# EAGLE board vga (EAGLE 7.2.0)
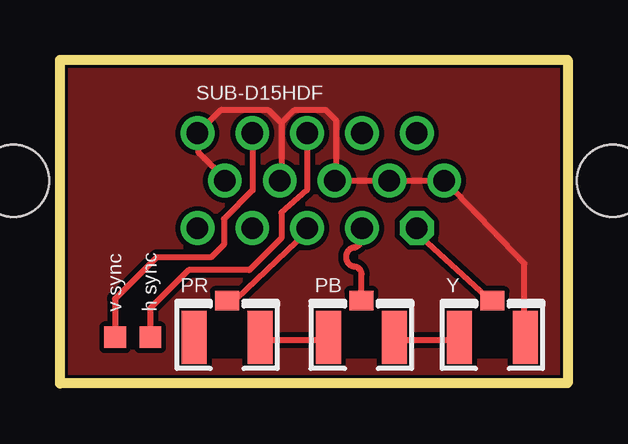
[diagram p0: board, top side]
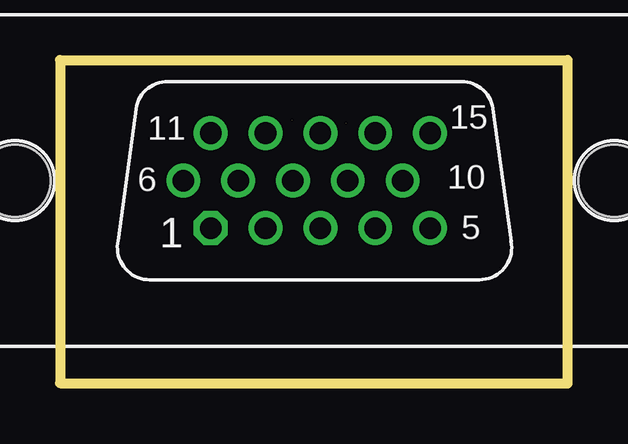
[diagram p1: board, bottom side, seen from below]

Size 21.17 x 13.5 mm. Coordinates in mm from the lower left corner, seen from the top.
Outline: 21.17,13.5 0,13.5 0,0 21.17,0.02 21.17,13.5
Copper layers (1*16): Top 0.035mm / dielectric 1.5mm / Bottom 0.035mm
Design rules "default *": minimum track width 10mil, minimum drill 24mil, track to track 8mil, track to pad 8mil, pad to pad 8mil, via to via 8mil, smd to smd 8mil, copper to edge 5mil, drill to drill 8mil, minimum pad ring 10mil, minimum via ring 8mil, stop-mask expansion 4mil, vias tented up to drill 0mil, thermal gap 10mil

## Footprints (pad centres in the part's own frame; a part is rotated, then mirrored left to right if it is on the bottom)
TP09SQ = smd 0.9 x 0.9: TP 0,0
U.FL = smd 2.2 x 1.05: 1 0,1.375; 2 0,-1.375 | smd 0.8 x 1: 3 1.525,0
HDF15V = drill 0.9 octagon: 1 4.579,1.98 | drill 0.9: 2 2.293,1.98; 3 0.007,1.98; 4 -2.279,1.98; 5 -4.565,1.98; 6 5.722,0; 7 3.436,0; 8 1.15,0; 9 -1.136,0; 10 -3.422,0; 11 4.579,-1.98; 12 2.293,-1.98; 13 0.007,-1.98; 14 -2.279,-1.98; 15 -4.565,-1.98 | hole 3: -12.25,0; 12.75,0

## Placement (x,y rotation side)
E$2  [TP09SQ]  2.3,1.93 0 top
HSYNC  [TP09SQ]  3.77,1.93 0 top
PB  [U.FL]  12.57,1.93 90 top
PR  [U.FL]  6.97,1.93 90 top
SUB-D15HDF  [HDF15V]  10.3,8.47 180 bottom
Y  [U.FL]  18.03,1.93 90 top

## Library data of the parts
E$2 HSYNC = testpad1
PB PR Y = adafruit
SUB-D15HDF = con-subd

## Tracks (layer width: path | path; a pad name or v marks a point on that pad's centre or on a via)
COMPONENT_PB
  Top 0.254: 12.57,3.67 12.57,4.49 arc90 12.32,4.87 arc-90 11.94,5.26 11.94,5.3 arc-90 12.32,5.69 arc90 12.57,6.33
COMPONENT_PR
  Top 0.254: 7.37,3.53 10.3,6.33
COMPONENT_Y
  Top 0.254: 18.03,3.4 14.83,6.33
GROUND  (2 unrouted)
  Top 0.254: 19.37,2.73 19.37,5 16.03,8.47 11.5,8.47 11.5,11 11.1,11.4 9.77,11.4 9.23,10.87 | 9.23,10.87 9.23,8.47 | 9.23,10.87 8.7,11.4 6.7,11.4 5.77,10.47 5.77,9.67 6.97,8.47
  pour Top: 21.1,13.4 0.03,13.53 -0.1,0.07 21.1,-0.07
HSYNC
  Top 0.254: 10.3,10.47 10.3,8.07 9.23,7.13 9.23,6.07 7.9,4.73 5.37,4.73 3.77,3.13 3.77,1.93
S$11
  Top 0.254: 16.7,1.8 14.03,1.8
S$12
  Top 0.254: 11.37,1.8 8.3,1.8
VSYNC
  Top 0.254: 8.03,10.47 8.03,8.07 6.83,6.87 6.83,5.8 6.3,5.27 4.03,5.27 2.3,3.53 2.3,1.93

## Text on the board
tNames: v sync | h sync